# Altium PCB PCB_KPHONE-BACK.PcbDoc
Units mm, origin at the board's own origin, x right, y up, seen from the top; angles counter-clockwise.
Board outline 50 x 110 mm, 2 copper layers (Top Layer, Bottom Layer), stack 1.671 mm thick; 4 components, 88 nets, 4 pads, 48 vias.
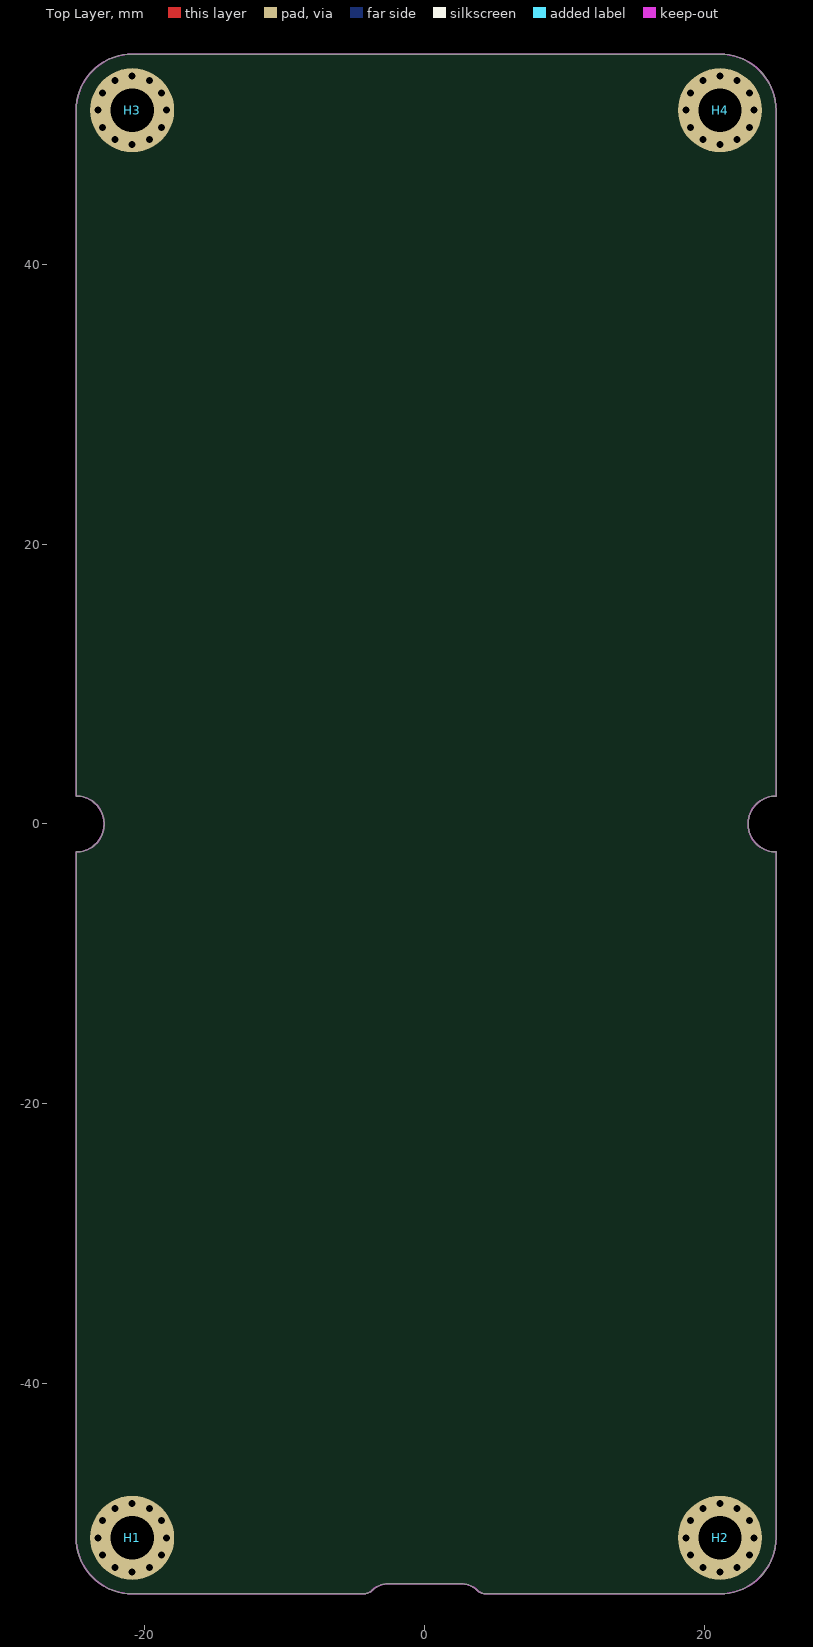
[diagram p0: Top Layer view]
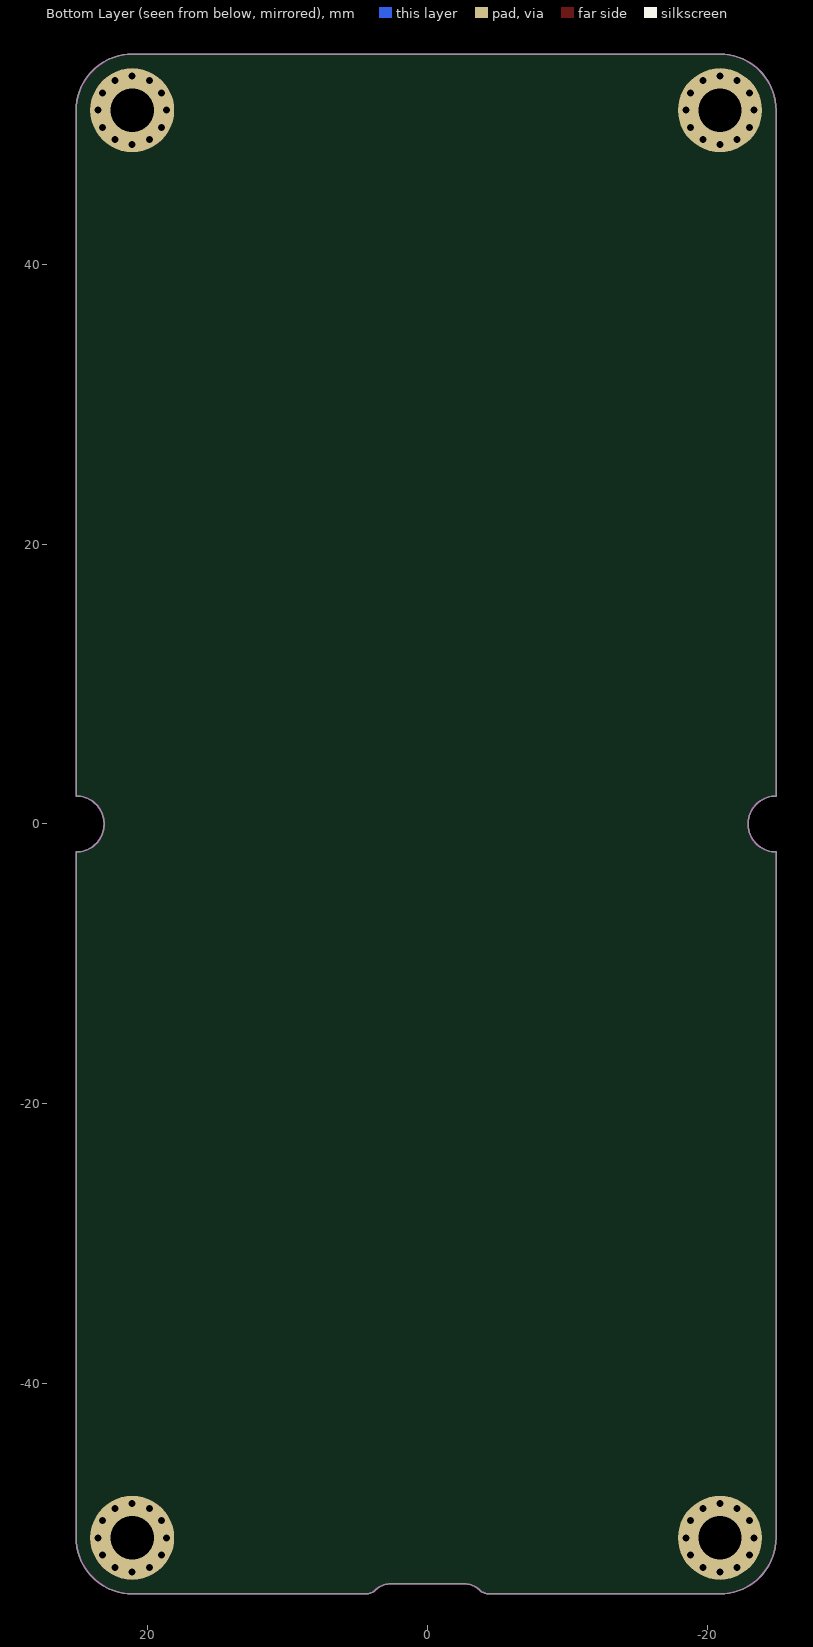
[diagram p1: Bottom Layer view, seen from below]

## Layer stack, top to bottom
Top Solder: solder mask 0.0102, Solder Resist, Dk 3.5
Top Layer: signal copper 0.0356
Dielectric 1: dielectric 1.6, FR-4, Dk 4.8
Bottom Layer: signal copper 0.0356
Bottom Solder: solder mask 0.0102, Solder Resist, Dk 3.5

## Board outline
-20.9,-55 -4.354,-55 ccw(c-4.354,-54.146) -3.75,-54.75 cw(c-2.639,-55.861) -2.639,-54.29 2.639,-54.29 cw(c2.639,-55.861) 3.75,-54.75 ccw(c4.354,-54.146) 4.354,-55 21.1,-55 ccw(c21.1,-51) 25.1,-51 25.1,-2 cw(c25.1,0) 25.1,2 25.1,51 ccw(c21.1,51) 21.1,55 -20.9,55 ccw(c-20.9,51) -24.9,51 -24.9,2 cw(c-24.9,0) -24.9,-2 -24.9,-51 ccw(c-20.9,-51)

## Design rules (kind name [scope] priority, off if disabled: settings)
Clearance [All] p1: gap=0.3 ignorepadtopadclearanceinfootprint=TRUE except(0.25: SMDPad-Fill SMDPad-Poly SMDPad-Region)
Clearance Clearance_MCU [All vs (HasFootprint('IC TQFN 32'))] p2: gap=0.3 ignorepadtopadclearanceinfootprint=TRUE except(0.1: Arc-SMDPad Track-SMDPad SMDPad-SMDPad)
ComponentClearance [All] p1: gap=0.01 collisioncheckmode=3 verticalgap=0.01 showdistances=FALSE donotcheckwithout3dbody=TRUE
DiffPairsRouting [All] p1: maxlimit=0.3 minlimit=0.3 mostfreqgap=0.3 toplayer_minwidth=0.25 toplayer_maxwidth=0.3 toplayer_prefwidth=0.3 bottomlayer_minwidth=0.25 bottomlayer_maxwidth=0.3 bottomlayer_prefwidth=0.3 maxuncoupledlength=15
HoleSize [All] p1: absolutevalues=TRUE maxlimit=5 minlimit=0 maxpercent=80.000 minpercent=20.000
HoleToHoleClearance [All] p1: gap=0.01 allowstackedmicrovias=TRUE
MinimumSolderMaskSliver [All] p1: minsoldermaskwidth=0.01
PlaneConnect [All] p1: pad.planeconnectstyle=Relief pad.reliefexpansion=0.3 pad.reliefentries=4 pad.reliefconductorwidth=0.5 pad.reliefairgap=0.3 via.planeconnectstyle=Direct via.reliefexpansion=0.3 via.reliefentries=4 via.reliefconductorwidth=0.5 via.reliefairgap=0.3
PolygonConnect [All] p1: connectstyle=Direct reliefconductorwidth=0.5 reliefentries=4 polygonreliefangle="90 Angle" airgapwidth=0.3
RoutingVias [All] p1: holewidth=0.4 width=0.8 viastyle="Through Hole" minholewidth=0.3 minwidth=0.6 maxholewidth=0.5 maxwidth=1
SilkToSilkClearance [All] p1: silktosilkclearance=0
SilkToSolderMaskClearance [IsPad] p1: minsilkscreentomaskgap=0 clearancetoexposedcopper=TRUE
SolderMaskExpansion [All] p1: expansion=0.102 istentingtop=FALSE
Width [All] p1: maxlimit=2 minlimit=0.3 preferedwidth=0.5
22 further rules are at their usual default settings.

## Classes and differential pairs
component class SCH_KPHONE: LCD2
differential pair MIC: +MIC_P -MIC_N
differential pair USB: +USB_P -USB_N

## Components (designator, comment, footprint, x,y, rotation, side; value= is the part's Value field where it differs from the comment)
H1 "=Value" HOLE-M3 -20.9,-51 r0 top
H2 "=Value" HOLE-M3 21.1,-51 r0 top
H3 "=Value" HOLE-M3 -20.9,51 r0 top
H4 "=Value" HOLE-M3 21.1,51 r0 top

## Footprints (in the part's own frame and the unit in brackets; to place one, negate y for a bottom-side part, rotate by r counter-clockwise, add the part's x,y. Pads: shape width x height; smd on the part's side, far side on the other; paste and mask are expansions set on the pad)
HOLE-M3 [mm]
  round 6 hole 3.1: 1(0,0)

## Part data
H1 H2 H3 H4: library part HOLE-1P, "Lỗ bắt vít"

## Via types
v1: diameter 1, hole 0.5, Top Layer to Bottom Layer, tented both sides, 48 vias

## Nets (pads, with @x,y where several pads share a name; then routed paths per layer and width w, separated by ;. In a path a pad name is that pad's centre, name@x,y a point inside that pad or via, vN(x,y) a via of type N, cw(c..) or ccw(c..) an arc to the next point about the centre after c; other vN are vias at no path point)
3V3: 
ANTEN: 
ATMEGA328_MISO: 
ATMEGA328_MOSI: 
ATMEGA328_RST: 
ATMEGA328_RX: 
ATMEGA328_SCK: 
ATMEGA328_TX: 
BAT+: 
BAT-: 
CH340_RX: 
CH340_TX: 
FB: 
GND: 
GND_BUCK: 
GND_USB: 
H1_1-2: 
H1_2-3: 
H2_5-6: 
H2_6-7: 
H3_3-11-12: 
H3_9-10: 
H3_10-11: 
H4_13-14: 
H4_14-15: 
H4_15-16: 
LCD_CLK: 
LCD_DC: 
LCD_DIN: 
LCD_RST: 
LCD_SCE: 
LED_LCD: 
LIGHT: 
MATRIX_BUTTON_C1: 
MATRIX_BUTTON_C2: 
MATRIX_BUTTON_C3: 
MATRIX_BUTTON_C4: 
MATRIX_BUTTON_H3: 
MATRIX_BUTTON_H4: 
MIC_N: 
MIC_P: 
NetBZ1_2: 
NetC2_1: 
NetC5_1: 
NetC12_2: 
NetC13_1: 
NetC14_1: 
NetC15_1: 
NetD1_A: 
NetLED1_2: 
NetLED2_2: 
NetLED3_2: 
NetLED4_2: 
NetLED5_2: 
NetLED6_2: 
NetLED7_2: 
NetLED11_2: 
NETLIGHT: 
NetM1_1: 
NetM1_2: 
NetM1_39: 
NetQ1_B: 
NetQ1_C: 
NetQ2_B: 
NetQ2_C: 
NetQ3_B: 
NetQ3_C: 
NetR6_1: 
NetR7_2: 
NetR8_2: 
NetR9_2: 
NetR12_2: 
NetU2_1: 
NetU2_3: 
OUT_3V3: 
SIM_CLK: 
SIM_DATA: 
SIM_RST: 
SIM_RX: 
SIM_TX: 
SIM_VDD: 
SPK+: 
SPK-: 
STATUS: 
USB_N: 
USB_P: 
V_USB: 
VCC_ON_BAT: 
pads on no net: H1.1 H2.1 H3.1 H4.1
copper on no net:
  other v1: -20.9,-53.438 21.1,-53.438 -22.119,-53.112 -19.681,-53.112 19.881,-53.112 22.319,-53.112 -23.012,-52.219 -18.788,-52.219 18.988,-52.219 23.212,-52.219 -23.338,-51 -18.462,-51 18.662,-51 23.538,-51 -23.012,-49.781 -18.788,-49.781 18.988,-49.781 23.212,-49.781 -22.119,-48.888 -19.681,-48.888 19.881,-48.888 22.319,-48.888 -20.9,-48.562 21.1,-48.562 -20.9,48.562 21.1,48.562 -22.119,48.888 -19.681,48.888 19.881,48.888 22.319,48.888 -23.012,49.781 -18.788,49.781 18.988,49.781 23.212,49.781 -23.338,51 -18.462,51 18.662,51 23.538,51 -23.012,52.219 -18.788,52.219 18.988,52.219 23.212,52.219 -22.119,53.112 -19.681,53.112 19.881,53.112 22.319,53.112 -20.9,53.438 21.1,53.438

## Keep-outs
Keep-Out Layer:
  lines w0.1: -24.9,-51 ccw(c-20.9,-51) -20.9,-55 -4.354,-55 ccw(c-4.354,-54.146) -3.75,-54.75 cw(c-2.639,-55.861) -2.639,-54.29 2.639,-54.29 cw(c2.639,-55.861) 3.75,-54.75 ccw(c4.354,-54.146) 4.354,-55 21.1,-55 ccw(c21.1,-51) 25.1,-51 25.1,-2 cw(c25.1,0) 25.1,2 25.1,51 ccw(c21.1,51) 21.1,55 18.055,55 17.6,55 -20.9,55 ccw(c-20.9,51) -24.9,51 -24.9,2 cw(c-24.9,0) -24.9,-2 -24.9,-51

## Silkscreen, mask and mechanical layers (free items; w line width, h text height)
Mechanical 15:
  lines w0.1: -20.9,-52 -20.9,-50 ; -20.9,50 -20.9,52 ; -19.9,-51 -21.9,-51 ; -19.9,51 -21.9,51 ; -15,-44 -15,-42 ; -15,-36 -15,-34 ; -15,-28 -15,-26 ; -15,-20 -15,-18 ; -15,-6 -15,-4 ; -14,-43 -16,-43 ; -14,-35 -16,-35 ; -14,-27 -16,-27 ; -14,-19 -16,-19 ; -14,-5 -16,-5 ; -1,-43 1,-43 ; -1,-35 1,-35 ; -1,-27 1,-27 ; -1,-19 1,-19 ; -0.059,55 cw(c-0.059,54.941) 0,54.941 0,0 ; 0,-44 0,-42 ; 0,-36 0,-34 ; 0,-28 0,-26 ; 0,-20 0,-18 ; 0,-11 0,-9 ; 0,-1 0,1 ; 1,-10 -1,-10 ; 1,0 -1,0 ; 14,-43 16,-43 ; 14,-35 16,-35 ; 14,-27 16,-27 ; 14,-19 16,-19 ; 15,-44 15,-42 ; 15,-36 15,-34 ; 15,-28 15,-26 ; 15,-20 15,-18 ; 15,-6 15,-4 ; 16,-5 14,-5 ; 21.1,-52 21.1,-50 ; 21.1,50 21.1,52 ; 22.1,-51 20.1,-51 ; 22.1,51 20.1,51 ; -21.9,-51 -21.9,-51 ; -21.9,51 -21.9,51 ; -16,-43 ccw(c-16,-43) -16,-43 ; -16,-43 -16,-43 ; -16,-35 -16,-35 ; -16,-27 -16,-27 ; -16,-19 -16,-19 ; -16,-5 -16,-5 ; -1,-10 -1,-10 ; -1,0 -1,0 ; 0,-43 ccw(c0,-43) 0,-43 ; 0,-43 0,-43 ; 14,-5 14,-5 ; 20.1,-51 20.1,-51 ; 20.1,51 20.1,51 ; -24.9,-55 25.1,-55 25.1,55 -24.9,55 -24.9,-55 ; 0,-35 0,-35 ; 0,-27 0,-27 ; 0,-19 0,-19